# EAGLE board Hybrid Panels Arduino Design (EAGLE 9.7.0)

Size 195.9 x 172.84 mm. Coordinates in mm from the lower left corner, seen from the top.
Outline: 0,0 195.9,0 195.9,172.84 0,172.84 0,0
Copper layers (1*16): Top 0.035mm / dielectric 1.5mm / Bottom 0.035mm
Design rules "default": minimum track width 6mil, minimum drill 0.35mm, track to track 6mil, track to pad 6mil, pad to pad 6mil, via to via 6mil, smd to smd 6mil, copper to edge 40mil, drill to drill 6mil, minimum pad ring 10mil, minimum via ring 8mil, stop-mask expansion 4mil, vias tented up to drill 0mil, thermal gap 10mil

## Footprints (pad centres in the part's own frame; a part is rotated, then mirrored left to right if it is on the bottom)
GL5528 = drill 0.8 pad 1.4: 1 -1.702,0; 2 1.702,0
RESAD1016W63L850D250B = drill 0.83 pad 1.43: 1 -5.08,0; 2 5.08,0
SWITCH-MOMENTARY-PTH-6.5MM = drill 1.016 pad 1.88: 1 -3.251,2.261; 2 3.251,2.261; 3 -3.251,-2.261; 4 3.251,-2.261
BATTERY-GENERIC = drill 1.118 pad 3.15 octagon: + 2.54,0; - -2.54,0
SG90 = drill 1.016 long: 1 -2.54,0; 2 0,0; 3 2.54,0
ARDUINO-UNO-R3-SHIELD = drill 1.016 pad 1.88: 3.3V 24.13,-2.54; 5V 24.13,0; A0 24.13,12.7; A1 24.13,15.24; A2 24.13,17.78; A3 24.13,20.32; A4 24.13,22.86; A5 24.13,25.4; AREF -24.13,-13.97; D2 -24.13,20.32; D3 -24.13,17.78; D4 -24.13,15.24; D5 -24.13,12.7; D6 -24.13,10.16; D7 -24.13,7.62; D8 -24.13,3.81; D9 -24.13,1.27; D10 -24.13,-1.27; D11 -24.13,-3.81; D12 -24.13,-6.35; D13 -24.13,-8.89; GND@0 24.13,2.54; GND@1 24.13,5.08; GND@2 -24.13,-11.43; IOREF 24.13,-7.62; NC 24.13,-10.16; RES 24.13,-5.08; RX -24.13,25.4; SCL -24.13,-19.05; SDA -24.13,-16.51; TX -24.13,22.86; VIN 24.13,7.62
TO92 = drill 0.813 octagon: 1 -1.27,0; 2 0,1.905; 3 1.27,0

## Placement (x,y rotation side)
R1  PHOTOCELL_GL5528  [GL5528]  7.6,31.24 0 top
R2  PHOTOCELL_GL5528  [GL5528]  17.76,31.24 0 top
R3  PHOTOCELL_GL5528  [GL5528]  27.92,31.24 0 top
R4  PHOTOCELL_GL5528  [GL5528]  38.08,31.24 0 top
R5  1k  [RESAD1016W63L850D250B]  6.33,18.54 90 top
R6  1k  [RESAD1016W63L850D250B]  16.49,18.54 90 top
R7  1k  [RESAD1016W63L850D250B]  26.65,18.54 90 top
R8  1k  [RESAD1016W63L850D250B]  36.81,18.54 90 top
R9  1k  [RESAD1016W63L850D250B]  153.65,21.08 90 top
R10  1k  [RESAD1016W63L850D250B]  146.03,21.08 90 top
S1  SWITCH_MOMENTARY  [SWITCH-MOMENTARY-PTH-6.5MM]  69.49,165.48 90 top
S2  SWITCH_MOMENTARY  [SWITCH-MOMENTARY-PTH-6.5MM]  92.46,165.48 90 top
SC1  BATTERYGENERIC  [BATTERY-GENERIC]  187.64,8.26 90 top
SERVO1  SERVOSG90  [SG90]  152.33,138.11 90 top
SERVO2  SERVOSG90  [SG90]  154.22,96.36 90 top
U1  ARDUINO-UNO-R3-SHIELD  [ARDUINO-UNO-R3-SHIELD]  86.49,115.15 270 top
U2  TMP36GT9Z_TO92  [TO92]  59.67,13.46 0 top

## Library data of the parts
R1-R10 S1 S2 SC1 SERVO1 SERVO2 U1 U2 = Tinkercad

## Nets
SC1+: R9.1 SC1.+
SC1-: R10.1 SC1.-
U1_5V: R1.2 R2.2 R3.2 SERVO1.2 SERVO2.2 U1.5V U2.3
U1_A0: R1.1 R5.2 U1.A0
U1_A1: R2.1 R6.2 U1.A1
U1_A2: R3.1 R7.2 U1.A2
U1_A3: R4.1 R8.2 U1.A3
U1_A4: R9.2 R10.2 U1.A4
U1_D2: U1.D2 U2.2
U1_D5: SERVO2.3 U1.D5
U1_D6: SERVO1.3 U1.D6
U1_D11: S2.1 U1.D11
U1_D12: S1.3 U1.D12
U1_GND: R4.2 R5.1 R6.1 R7.1 R8.1 S1.1 S2.3 SERVO1.1 SERVO2.1 U1.GND@0 U1.GND@1 U1.GND@2 U2.1

## Tracks (layer width: path | path; a pad name or v marks a point on that pad's centre or on a via)
SC1+  (1 unrouted)
SC1-  (1 unrouted)
U1_5V  (6 unrouted)
U1_A0  (2 unrouted)
U1_A1  (2 unrouted)
U1_A2  (2 unrouted)
U1_A3  (2 unrouted)
U1_A4  (2 unrouted)
U1_D2  (1 unrouted)
U1_D5  (1 unrouted)
U1_D6  (1 unrouted)
U1_D11  (1 unrouted)
U1_D12  (1 unrouted)
U1_GND  (12 unrouted)